# Altium PCB 400236.PcbDoc (part 2 of 7)
Units mm, origin at the board's own origin, x right, y up, seen from the top; angles counter-clockwise.
Board outline 136.53 x 63.5 mm, 4 copper layers (Top Layer, Mid-Layer 1, Mid-Layer 2, Bottom Layer), stack 1.49 mm thick; 344 components, 236 nets, 1364 pads, 1393 vias.
Unrouted connection lines stored in the file: 6.
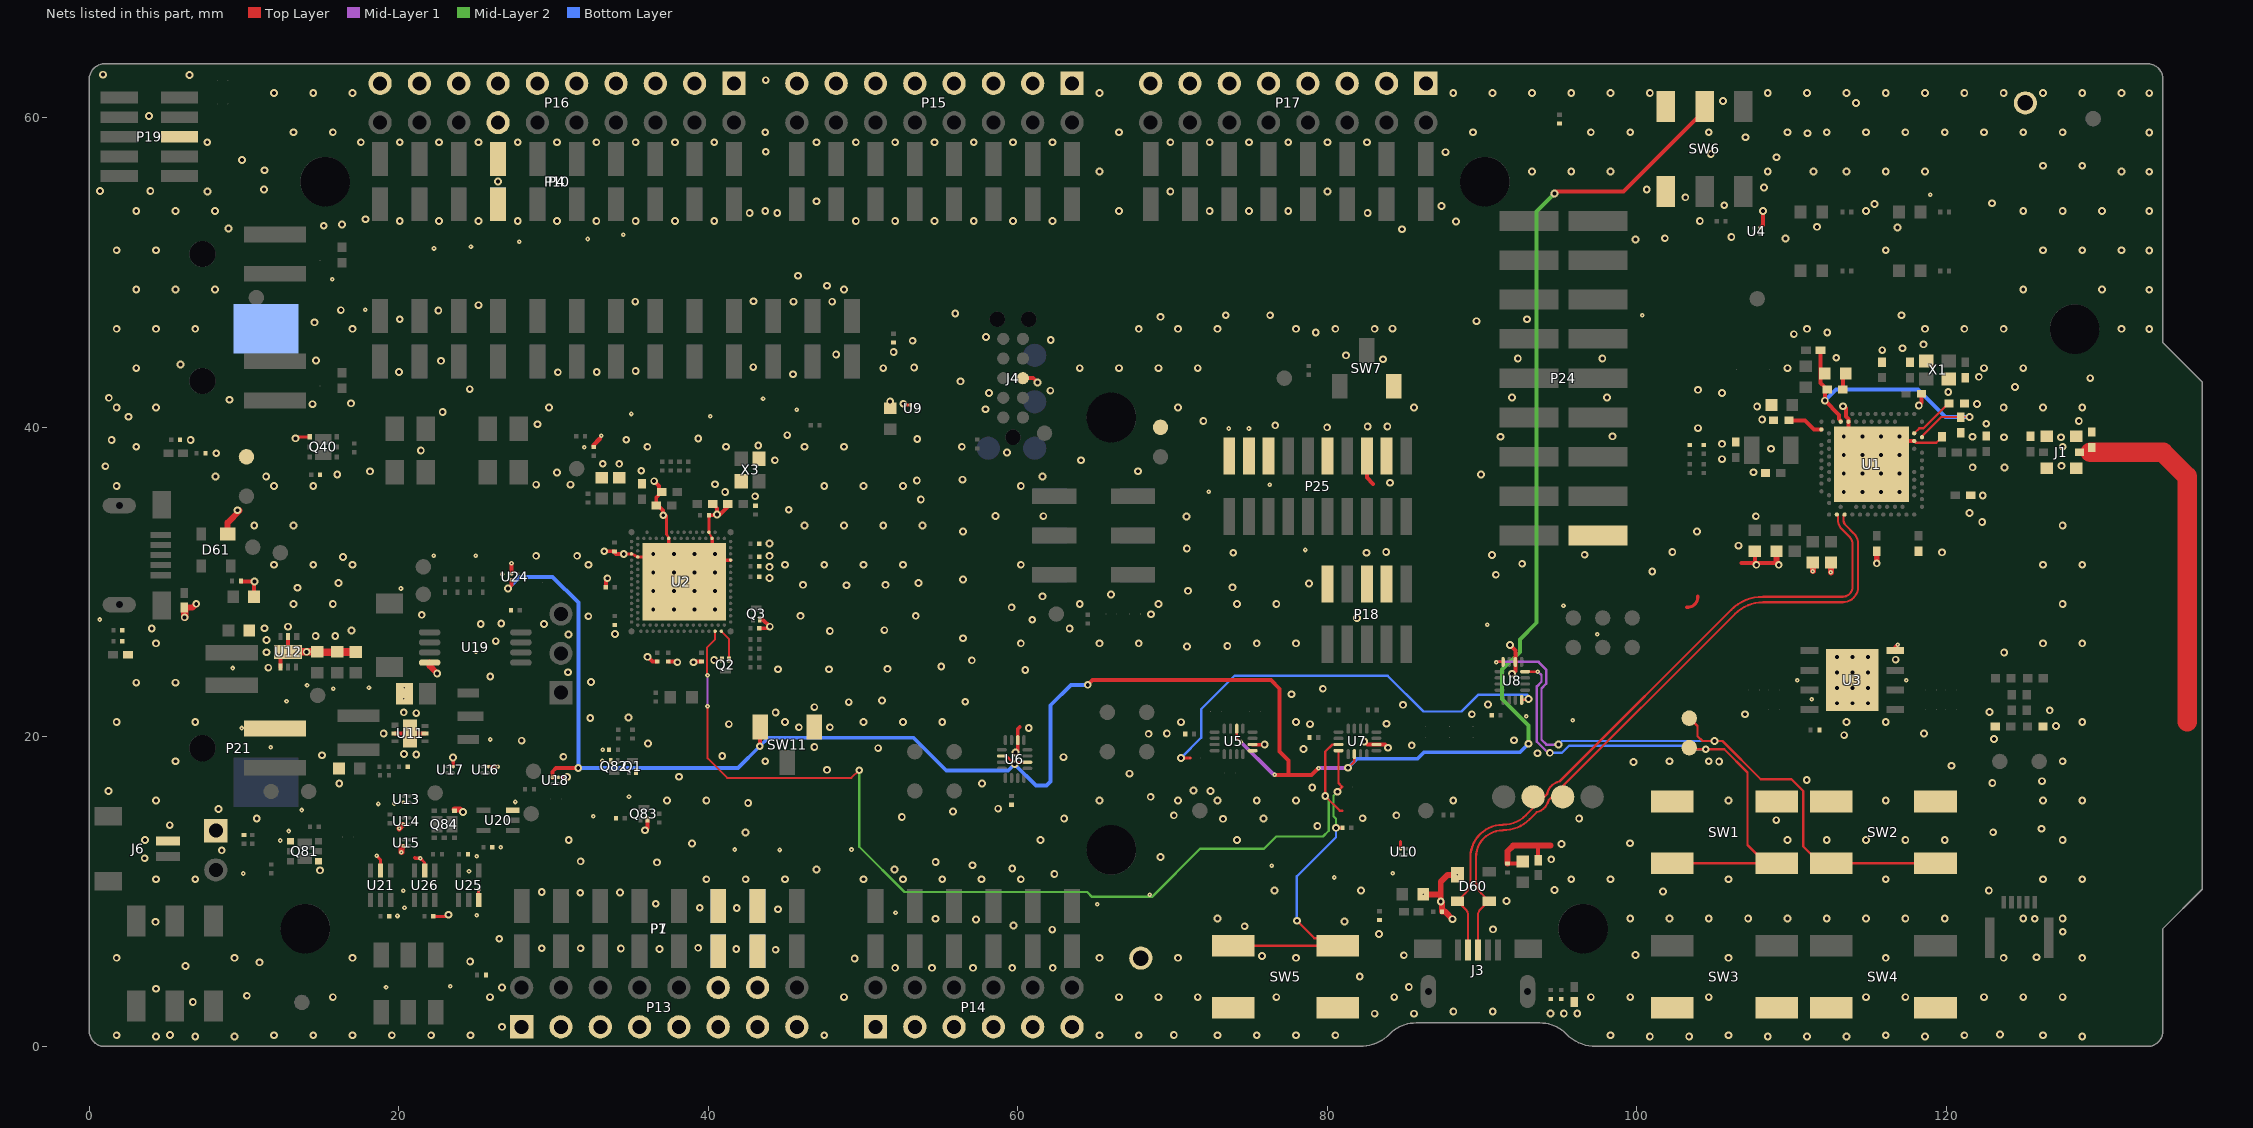
[diagram p4: the nets of this part, all layers, seen from the top]

## Part data
Bat1: library part "Bat Holder L-KLS5-CR2032-23-B1", "Bat Holder CR2032 SMD", Manufacturer="KLS Electronic", Manufacturer Part Number=L-KLS5-CR2032-23-B1, Part number IPS=N.A., Part number NEMS=100500651, Artikkelnr Noca=N.A., Author=rsk, Component Class=Connectors, Component Status=Active, ComponentLink1Description=Datasheet, ComponentLink1URL=http://www.klsele.com/admin/product_upload/20151124103736KLS5-CR2032-23-B.pdf, ComponentLink2Description="Supplier link", ComponentLink2URL=N.A., Footprint Doc=CR2032_HOLDER, HelpURL=http://www.klsele.com/products/connectors/Coin-Cell-Holders-Series/4685.html, LatestRevisionDate=2019-08-29, Note="Bat Holder CR2032", Pad Count=2, Part Number="Bat Holder L-KLS5-CR2032-23-B1", Part number Norautron=N.A., PartId=100500651, Published=2019-08-28, Supplier 1=Cabcon, Supplier 2=Mouser, Supplier Part Number 1=L-KLS5-CR2032-23-B1, Supplier Part Number 2=614-SMTU2032-LF, System=Connector
C1 C2 C17 C18: library part C0402-12p, "Capacitor, NP0, ±2%", Manufacturer=N.A., Part number IPS=00000002398, Part number NEMS=100200137, Artikkelnr Noca=20029159, Author=rsk, Component Class=Capacitors, Component Status=Active, ComponentLink1Description=Datasheet, ComponentLink1URL=N.A., ComponentLink2Description="Supplier link", ComponentLink2URL=N.A., Footprint Doc=0402, HelpURL=N.A., LatestRevisionDate=2011-05-11, Manufacturer Part Number=N.A., Note=50V, Pad Count=2, Part Number=C0402-12p, Part number Norautron=N.A., PartId=100200137, Published=2009-05-08, Supplier 1=N.A., Supplier 2=N.A., Supplier Part Number 1=N.A., Supplier Part Number 2=N.A.
C3: library part C0402-0.8p, "Capacitor, NP0, ±5%", Manufacturer=N.A., Part number IPS=00000007782, Part number NEMS=100200116, Artikkelnr Noca=N.A., Author=rsk, Component Class=Capacitors, Component Status=Active, ComponentLink1Description=Datasheet, ComponentLink1URL=https://www.murata.com/~/media/webrenewal/support/library/catalog/products/capacitor/mlcc/c02e.ashx?la=en-us, ComponentLink2Description="Supplier link", ComponentLink2URL=N.A., Footprint Doc=0402, HelpURL=N.A., LatestRevisionDate=2012-11-21, Manufacturer Part Number=N.A., Note=50V, Pad Count=2, Part Number=C0402-0.8p, Part number Norautron=N.A., PartId=100200116, Published=2009-05-08, Supplier 1=N.A., Supplier 2=N.A., Supplier Part Number 1=N.A., Supplier Part Number 2=N.A.
C4: library part C0402-0.5p, "Capacitor, C0G, ±0.05pF, 50V", Manufacturer=N.A., Part number IPS=00000004293, Part number NEMS=100200112, Artikkelnr Noca=N.A., Author=rsk, Component Class=Capacitors, Component Status=Active, ComponentLink1Description=Datasheet, ComponentLink1URL=N.A., ComponentLink2Description="Supplier link", ComponentLink2URL=N.A., Footprint Doc=0402, HelpURL=N.A., LatestRevisionDate=2020-10-13, Manufacturer Part Number=N.A., Note=50V, Pad Count=2, Part Number=C0402-0.5p, Part number Norautron=N.A., PartId=100200112, Published=2009-05-08, Supplier 1=N.A., Supplier 2=N.A., Supplier Part Number 1=N.A., Supplier Part Number 2=N.A.
C5 C7 C8 C12: library part C0402-100n, "Capacitor, X7R, ±10%", Manufacturer=N.A., Part number IPS=00000005296, Part number NEMS=100200184, Artikkelnr Noca=20039200, Author=rsk, Component Class=Capacitors, Component Status=Active, ComponentLink1Description=Datasheet, ComponentLink1URL=N.A., ComponentLink2Description="Supplier link", ComponentLink2URL=N.A., Footprint Doc=0402, HelpURL=N.A., LatestRevisionDate=2009-11-23, Manufacturer Part Number=N.A., Note=16V, Pad Count=2, Part Number=C0402-100n, Part number Norautron=N.A., PartId=100200184, Published=2009-05-08, Supplier 1=N.A., Supplier 2=N.A., Supplier Part Number 1=N.A., Supplier Part Number 2=N.A.
C6 C20 C38: library part C0603-4µ7-6.3V-X7R, "Capacitor, X7R, ±10%, 6.3V", Manufacturer="Samsung Electro-Mechanics America", Manufacturer Part Number=CL10B475KQ8NQNC, Part number IPS=00000002541, Part number NEMS=100200350, Part number Norautron=N.A., Supplier Part Number 1=1276-2087-1-ND, Artikkelnr Noca=20039473, Author=rsk, Component Class=Capacitors, Component Status=Active, ComponentLink1Description=Datasheet, ComponentLink1URL=N.A., ComponentLink2Description="Supplier link", ComponentLink2URL=N.A., Footprint Doc=0603, HelpURL=http://media.digikey.com/pdf/Data%20Sheets/Samsung%20PDFs/CL10B475KQ8NQNC_Spec.pdf, LatestRevisionDate=2015-06-10, Note=6.3V, Pad Count=2, Part Number=C0603-4µ7-6.3V-X7R, PartId=100200350, Published=2015-06-10, Supplier 1=Digi-Key, Supplier 2=N.A., Supplier Part Number 2=N.A.
C9 C10 C13 C22: library part C0402-N.C., "Not mounted", Manufacturer=N.A., Part number NEMS=100200105, Artikkelnr Noca=N.A., Assembly="Not mounted", Author=rsk, Component Class=Capacitors, Component Status=Active, ComponentLink1Description=Datasheet, ComponentLink1URL=N.A., ComponentLink2Description="Supplier link", ComponentLink2URL=N.A., Footprint Doc=0402, HelpURL=N.A., LatestRevisionDate=2009-05-08, Manufacturer Part Number=N.A., Note="Chip Cap", Pad Count=2, Part Number=C0402-N.C., Part number IPS=N.A., Part number Norautron=N.A., PartId=100200105, Published=2009-05-08, Supplier 1=N.A., Supplier 2=N.A., Supplier Part Number 1=N.A., Supplier Part Number 2=N.A.
C11: library part C0402-100p, "Capacitor, NP0, ±5%", Manufacturer=N.A., Part number IPS=00000002361, Part number NEMS=100200148, Artikkelnr Noca=20029135, Author=rsk, Component Class=Capacitors, Component Status=Active, ComponentLink1Description=Datasheet, ComponentLink1URL=N.A., ComponentLink2Description="Supplier link", ComponentLink2URL=N.A., Footprint Doc=0402, HelpURL=N.A., LatestRevisionDate=2009-05-08, Manufacturer Part Number=N.A., Note=50V, Pad Count=2, Part Number=C0402-100p, Part number Norautron=N.A., PartId=100200148, Published=2009-05-08, Supplier 1=N.A., Supplier 2=N.A., Supplier Part Number 1=N.A., Supplier Part Number 2=N.A.
C14 C15 C91 C92: library part C0603-1µ0, "Capacitor, X7R, ±10%", Manufacturer=N.A., Part number IPS=00000000616, Part number NEMS=100200271, Part number Norautron=262083409, Artikkelnr Noca=20039282, Author=rsk, Component Class=Capacitors, Component Status=Active, ComponentLink1Description=Datasheet, ComponentLink1URL=N.A., ComponentLink2Description="Supplier link", ComponentLink2URL=N.A., Footprint Doc=0603, HelpURL=N.A., LatestRevisionDate=2013-06-05, Manufacturer Part Number=N.A., Note=16V, Pad Count=2, Part Number=C0603-1µ0, PartId=100200271, Published=2009-05-08, Supplier 1=N.A., Supplier 2=N.A., Supplier Part Number 1=N.A., Supplier Part Number 2=N.A.
C16: library part C0402-47n, "Capacitor, X7R, ±10%, 25V", Manufacturer=N.A., Part number IPS=00000003143, Part number NEMS=100200180, Artikkelnr Noca=20039389, Author=rsk, Component Class=Capacitors, Component Status=Active, ComponentLink1Description=Datasheet, ComponentLink1URL=N.A., ComponentLink2Description="Supplier link", ComponentLink2URL=N.A., Footprint Doc=0402, HelpURL=N.A., LatestRevisionDate=2020-10-13, Manufacturer Part Number=N.A., Note="Chip Cap 10%", Pad Count=2, Part Number=C0402-47n, Part number Norautron=N.A., PartId=100200180, Published=2009-05-08, Supplier 1=N.A., Supplier 2=N.A., Supplier Part Number 1=N.A., Supplier Part Number 2=N.A.
C19 C21 C37: library part C0603-4µ7-10V-X7S, "Capacitor, X7S, ±10%, 10V", Manufacturer=N.A., Part number IPS=00000001779, Part number NEMS=100200351, Supplier Part Number 1=445-14258-1-ND, Artikkelnr Noca=20030013, Author=rsk, Component Class=Capacitors, Component Status=Active, ComponentLink1Description=Datasheet, ComponentLink1URL=N.A., ComponentLink2Description="Supplier link", ComponentLink2URL=N.A., Footprint Doc=0603, HelpURL=N.A., LatestRevisionDate=2016-08-15, Manufacturer Part Number=N.A., Note=10V, Pad Count=2, Part Number=C0603-4µ7-10V-X7S, Part number Norautron=N.A., PartId=100200351, Published=2016-08-15, Supplier 1=Digi-Key, Supplier 2=N.A., Supplier Part Number 2=N.A.
C23: library part C0402-1.2p, "Capacitor, NP0, ±0.1pF", Manufacturer=N.A., Part number IPS=00000005410, Part number NEMS=100200119, Artikkelnr Noca=20029157, Author=rsk, Component Class=Capacitors, Component Status=Active, ComponentLink1Description=Datasheet, ComponentLink1URL=N.A., ComponentLink2Description="Supplier link", ComponentLink2URL=N.A., Footprint Doc=0402, HelpURL=N.A., LatestRevisionDate=2011-05-11, Manufacturer Part Number=N.A., Note=50V, Pad Count=2, Part Number=C0402-1.2p, Part number Norautron=N.A., PartId=100200119, Published=2009-05-08, Supplier 1=N.A., Supplier 2=N.A., Supplier Part Number 1=N.A., Supplier Part Number 2=N.A.
C24 C25 C26 C27 C31 C32 C33 C34 C39 C42 C45 C48 C49 C50 C62 C65 C68 C69 C85 C89 C90 C93 C94: library part C0201-100n, "Capacitor, X5R, ±10%", Manufacturer=N.A., Part number IPS="00000001248, 00000002505", Part number NEMS=100200078, Part number Norautron=262071862, Artikkelnr Noca=N.A., Author=rsk, Component Class=Capacitors, Component Status=Active, ComponentLink1Description=Datasheet, ComponentLink1URL=N.A., ComponentLink2Description="Supplier link", ComponentLink2URL=N.A., Footprint Doc=0201, HelpURL=N.A., LatestRevisionDate=2017-11-09, Manufacturer Part Number=N.A., Note=16V, Pad Count=2, Part Number=C0201-100n, PartId=100200078, Published=2014-11-13, Supplier 1=N.A., Supplier 2=N.A., Supplier Part Number 1=N.A., Supplier Part Number 2=N.A.
C28 C29 C35 C36 C40: library part C0402-1µ0-6.3V-X5R-10%, "Capacitor, X5R, ±10%, 6.3V", Manufacturer=N.A., Part number NEMS=100200498, Part number Norautron=26207137, Artikkelnr Noca=N.A., Author=rubr, Component Class=Capacitors, Component Status=Active, ComponentLink1Description=Datasheet, ComponentLink1URL=N.A., ComponentLink2Description="Supplier link", ComponentLink2URL=N.A., Footprint Doc=0402, HelpURL=N.A., LatestRevisionDate=2022-01-27, Manufacturer Part Number=N.A., Note=6.3V, Pad Count=2, Part Number=C0402-1µ0-6.3V-X5R-10%, Part number IPS=N.A., PartId=100200498, Published=2022-01-27, Supplier 1=N.A., Supplier 2=N.A., Supplier Part Number 1=N.A., Supplier Part Number 2=N.A.
C30: library part C0201-2n2, "Capacitor, X7R, ±10%, 10V", Manufacturer=N.A., Part number IPS=00000001778, Part number NEMS=100200060, Part number Norautron=26470002, Artikkelnr Noca=N.A., Author=rsk, Component Class=Capacitors, Component Status=Active, ComponentLink1Description=Datasheet, ComponentLink1URL=N.A., ComponentLink2Description="Supplier link", ComponentLink2URL=N.A., Footprint Doc=0201, HelpURL=N.A., LatestRevisionDate=2014-11-13, Manufacturer Part Number=N.A., Note=10V, Pad Count=2, Part Number=C0201-2n2, PartId=100200060, Published=2014-11-13, Supplier 1=N.A., Supplier 2=N.A., Supplier Part Number 1=N.A., Supplier Part Number 2=N.A.
C46 C47: library part C0402-300p, "Capacitor, C0G, ±5%, 50V", Manufacturer=N.A., Part number IPS=00000007788, Part number NEMS=100200155, Supplier Part Number 1=490-3234-1-ND, Artikkelnr Noca=20020004, Author=rsk, Component Class=Capacitors, Component Status=Active, ComponentLink1Description=Datasheet, ComponentLink1URL=N.A., ComponentLink2Description="Supplier link", ComponentLink2URL=N.A., Footprint Doc=0402, HelpURL=N.A., LatestRevisionDate=2020-10-13, Manufacturer Part Number=N.A., Note=50V, Pad Count=2, Part Number=C0402-300p, Part number Norautron=N.A., PartId=100200155, Published=2015-05-29, Supplier 1=Digi-Key, Supplier 2=N.A., Supplier Part Number 2=N.A.
C51 C52: library part C0201-N.C., "Not mounted", Manufacturer=N.A., Part number NEMS=100200001, Artikkelnr Noca=N.A., Assembly="Not mounted", Author=rsk, Component Class=Capacitors, Component Status=Active, ComponentLink1Description=Datasheet, ComponentLink1URL=N.A., ComponentLink2Description="Supplier link", ComponentLink2URL=N.A., Footprint Doc=0201, HelpURL=N.A., LatestRevisionDate=2014-11-13, Manufacturer Part Number=N.A., Note="Chip Cap", Pad Count=2, Part Number=C0201-N.C., Part number IPS=N.A., Part number Norautron=N.A., PartId=100200001, Published=2014-11-13, Supplier 1=N.A., Supplier 2=N.A., Supplier Part Number 1=N.A., Supplier Part Number 2=N.A.
C53 C60 C63: library part C0201-10n, "Capacitor, X7R, ±10%", Manufacturer=N.A., Part number IPS=00000003480, Part number NEMS=100200067, Part number Norautron=26621779, Artikkelnr Noca=N.A., Author=rsk, Component Class=Capacitors, Component Status=Active, ComponentLink1Description=Datasheet, ComponentLink1URL=N.A., ComponentLink2Description="Supplier link", ComponentLink2URL=N.A., Footprint Doc=0201, HelpURL=N.A., LatestRevisionDate=2017-11-09, Manufacturer Part Number=N.A., Note=10V, Pad Count=2, Part Number=C0201-10n, PartId=100200067, Published=2014-11-13, Supplier 1=N.A., Supplier 2=N.A., Supplier Part Number 1=N.A., Supplier Part Number 2=N.A.
C61 C64: library part C0603-10µ, "Capacitor, X5R, ±20%", Manufacturer=N.A., Part number IPS=00000007785, Part number NEMS=100200275, Artikkelnr Noca=20039234, Author=rsk, Component Class=Capacitors, Component Status=Active, ComponentLink1Description=Datasheet, ComponentLink1URL=N.A., ComponentLink2Description="Supplier link", ComponentLink2URL=N.A., Footprint Doc=0603, HelpURL=N.A., LatestRevisionDate=2011-01-17, Manufacturer Part Number=N.A., Note=6.3V, Pad Count=2, Part Number=C0603-10µ, Part number Norautron=N.A., PartId=100200275, Published=2011-01-17, Supplier 1=N.A., Supplier 2=N.A., Supplier Part Number 1=N.A., Supplier Part Number 2=N.A.
C66 C67: library part C0201-4n7, "Capacitor, X7R, ±10%, 10V", Manufacturer=N.A., Part number IPS=00000001243, Part number NEMS=100200063, Artikkelnr Noca=N.A., Assembly="Not mounted", Author=rsk, Component Class=Capacitors, Component Status=Active, ComponentLink1Description=Datasheet, ComponentLink1URL=N.A., ComponentLink2Description="Supplier link", ComponentLink2URL=N.A., Footprint Doc=0201, HelpURL=N.A., LatestRevisionDate=2020-10-13, Manufacturer Part Number=N.A., Note="Chip Cap 1%", Pad Count=2, Part Number=C0201-4n7, Part number Norautron=N.A., PartId=100200063, Published=2014-11-13, Supplier 1=N.A., Supplier 2=N.A., Supplier Part Number 1=N.A., Supplier Part Number 2=N.A.
C80 C82 C83 C88: library part C0603-10µ-25V-X5R-CL10A106MA8NRNC, "Capacitor, X5R, ±20%, 25V", Manufacturer="Samsung Electro-Mechanics America", Manufacturer Part Number=CL10A106MA8NRNC, Part number IPS=00000009948, Part number NEMS=100200354, Part number Norautron=N.A., Supplier Part Number 1=1276-1869-1-ND, Artikkelnr Noca=20039436, Author=rsk, Component Class=Capacitors, Component Status=Active, ComponentLink1Description=Datasheet, ComponentLink1URL=N.A., ComponentLink2Description="Supplier link", ComponentLink2URL=N.A., Footprint Doc=0603, HelpURL=http://www.samsungsem.com/kr/front/downloadcms.do?path=/kr/support/product-search/mlcc/__icsFiles/afieldfile/2014/11/05&fileName=S_CL10A106MA8NRNC.pdf, LatestRevisionDate=2021-07-21, Note=25V, Pad Count=2, Part Number=C0603-10µ-25V-X5R-CL10A106MA8NRNC, PartId=100200354, Published=2015-04-10, Supplier 1=Digi-Key, Supplier 2=N.A., Supplier Part Number 2=N.A.
C86: library part C0805-4µ7, "Capacitor, X5R, ±10%, 16V", Manufacturer=N.A., Part number IPS=00000006289, Part number NEMS=100200284, Artikkelnr Noca=20039266, Author=rsk, Component Class=Capacitors, Component Status=Active, ComponentLink1Description=Datasheet, ComponentLink1URL=N.A., ComponentLink2Description="Supplier link", ComponentLink2URL=N.A., Footprint Doc=0805, HelpURL=N.A., LatestRevisionDate=2020-04-28, Manufacturer Part Number=N.A., Note=16V, Pad Count=2, Part Number=C0805-4µ7, Part number Norautron=N.A., PartId=100200284, Published=2009-08-21, Supplier 1=N.A., Supplier 2=N.A., Supplier Part Number 1=N.A., Supplier Part Number 2=N.A.
C87: library part C0201-150p-25V-COG-GRM0335C1E151JA01D, "Capacitor, NP0, ±5%, 25V", Manufacturer=N.A., Part number IPS=00000004306, Part number NEMS=100200444, Artikkelnr Noca=N.A., Author=getr, Component Class=Capacitors, Component Status=Active, ComponentLink1Description=Datasheet, ComponentLink1URL=https://www.mouser.com/datasheet/2/281/murata_03052018_GRM_Series_1-1310166.pdf, ComponentLink2Description="Supplier link", ComponentLink2URL=https://www.mouser.com/ProductDetail/Murata-Electronics/GRM0335C1E151JA01D?qs=%2Fha2pyFaduiNjPL6xbzKSo%252BchgTMqklsGrBRdYVX326W%252BRpjq1WqAQZ5mC%252Bu6szW, Footprint Doc=0201, HelpURL=N.A., LatestRevisionDate=2020-10-13, Manufacturer Part Number=N.A., Note="Chip Cap 5%", Pad Count=2, Part Number=C0201-150p-25V-COG-GRM0335C1E151JA01D, Part number Norautron=N.A., PartId=100200444, Published=2020-03-17, Supplier 1=N.A., Supplier 2=N.A., Supplier Part Number 1=N.A., Supplier Part Number 2=N.A.
C96: library part C0603-N.C., "Not mounted", Manufacturer=N.A., Part number NEMS=100200195, Artikkelnr Noca=N.A., Assembly="Not mounted", Author=rsk, Component Class=Capacitors, Component Status=Active, ComponentLink1Description=Datasheet, ComponentLink1URL=N.A., ComponentLink2Description="Supplier link", ComponentLink2URL=N.A., Footprint Doc=0603, HelpURL=N.A., LatestRevisionDate=2009-05-08, Manufacturer Part Number=N.A., Note="Chip Cap", Pad Count=2, Part Number=C0603-N.C., Part number IPS=N.A., Part number Norautron=N.A., PartId=100200195, Published=2009-05-08, Supplier 1=N.A., Supplier 2=N.A., Supplier Part Number 1=N.A., Supplier Part Number 2=N.A.
D60 D61: "Ultra low capacitance double rail-to-rail ESD protection diode", Manufacturer="NXP Semiconductors", Part number IPS=00000009951, Part number NEMS=101300082, Part number Norautron=26313940, Supplier Part Number 1=568-4140-1-ND, Artikkelnr Noca=10069015, Author=rsk, Component Class=Semiconductors, Component Status=Active, ComponentLink1Description=Datasheet, ComponentLink1URL=N.A., ComponentLink2Description="Supplier link", ComponentLink2URL=N.A., Footprint Doc=SOT-143B, HelpURL=http://www.farnell.com/datasheets/109718.pdf, LatestRevisionDate=2017-11-09, Manufacturer Part Number=PRTR5V0U2X, Note=N.A., Pad Count=4, Part Number=PRTR5V0U2X, PartId=101300082, Published=2012-06-11, Supplier 1=Digi-Key, Supplier 2=Farnell, Supplier Part Number 2=152-4157
D80 D81 D82 D83: "20V schottky barrier diode, Vf 350 mV @ 100 mA, Ir 2.0 µA @ 10 V, If 500 mA", Manufacturer="ON Semiconductor", Part number IPS=00000009952, Part number NEMS=101300131, Part number Norautron=26311081, Supplier Part Number 1=NSR0620P2T5GOSCT-ND, Artikkelnr Noca=10029169, Author=rsk, Component Class=Semiconductors, Component Status=Active, ComponentLink1Description=Datasheet, ComponentLink1URL=N.A., ComponentLink2Description="Supplier link", ComponentLink2URL=N.A., Footprint Doc=SOD-923, HelpURL=http://www.onsemi.com/pub_link/Collateral/NSR0620P2-D.PDF, LatestRevisionDate=2016-07-07, Manufacturer Part Number=NSR0620P2T5G, Note=N.A., Pad Count=2, Part Number=NSR0620P2T5G, PartId=101300131, Published=2016-07-07, Supplier 1=Digi-Key, Supplier 2=N.A., Supplier Part Number 2=N.A.
D84: "Diode Schottky Vf=0.45, Vr=40V, If=1A, Ir=1µA", Manufacturer="Good-Ark Semiconductor", Part number IPS=N.A., Part number NEMS=101300212, Supplier Part Number 1=4786-LS14CT-ND, Artikkelnr Noca=N.A., Author=rubr, Component Class=Semiconductors, Component Status=Active, ComponentLink1Description=Datasheet, ComponentLink1URL=https://goodarksemi.com/docs/datasheets/schottky_rectifiers/LS12-LS1CH.pdf, ComponentLink2Description="Supplier link", ComponentLink2URL=https://www.digikey.com/en/products/detail/good-ark-semiconductor/LS14/18667718, Footprint Doc=DO-214AC, HelpURL=N.A., LatestRevisionDate=2024-04-26, Manufacturer Part Number=LS14, Note=N.A., Pad Count=2, Part Number=LS14, Part number Norautron=N.A., PartId=101300212, Published=2024-04-26, Supplier 1=Digi-Key, Supplier 2=N.A., Supplier Part Number 2=N.A.
FB60 FB61 FB62 FB63 FB64 FB65: library part FB0402-120R@100M-500mA, "Ferrite Bead, 120 Ohm @ 100MHz, 500mA, 250 mOhm Max", Manufacturer=Murata, Manufacturer Part Number=BLM15AG121SN1D, Part number IPS=00000009954, Part number NEMS=100300099, Part number Norautron=265230631, Supplier Part Number 1=490-1005-1-ND, Artikkelnr Noca=33029317, Author=rsk, Component Class=Inductors, Component Status=Active, ComponentLink1Description=Datasheet, ComponentLink1URL=N.A., ComponentLink2Description="Supplier link", ComponentLink2URL=N.A., Footprint Doc=0402, HelpURL=http://search.murata.co.jp/Ceramy/image/img/PDF/ENG/L0110S0100BLM15A_SN.pdf, LatestRevisionDate=2014-01-10, Note="Chip EMIFIL Inductor Type Chip Ferrite Bead", Pad Count=2, Part Number=FB0402-120R@100M-500mA, PartId=100300099, Published=2011-11-14, Supplier 1=Digi-Key, Supplier 2=Farnell, Supplier Part Number 2=151-5760
  FB64 FB65: Assembly="Not mounted"
Fid1 Fid2: library part Fid-Mark, "Fiducial Mark", Manufacturer=N.A., Part number NEMS=100500073, Artikkelnr Noca=N.A., Author=rsk, Component Class=Connectors, Component Status=Active, ComponentLink1Description=Datasheet, ComponentLink1URL=N.A., ComponentLink2Description="Supplier link", ComponentLink2URL=N.A., Footprint Doc=Fiducial, HelpURL=N.A., LatestRevisionDate=2009-12-12, Manufacturer Part Number=N.A., Note=N.A., Pad Count=1, Part Number=Fid-Mark, Part number IPS=N.A., Part number Norautron=N.A., PartId=100500073, Published=2009-12-12, Supplier 1=N.A., Supplier 2=N.A., Supplier Part Number 1=N.A., Supplier Part Number 2=N.A., System=Connector
J1: "Coaxial Connector with Switch", Manufacturer=Murata, Part number IPS=00000009955, Part number NEMS=100500400, Part number Norautron=26030338, Supplier Part Number 1=490-4981-1-ND, Artikkelnr Noca=55029011, Author=rsk, Component Class=Connectors, Component Status=Active, ComponentLink1Description=Datasheet, ComponentLink1URL=N.A., ComponentLink2Description="Supplier link", ComponentLink2URL=N.A., Footprint Doc=COAXIAL-SWF, HelpURL=http://www.murata.com/products/catalog/pdf/o33e.pdf, LatestRevisionDate=2014-04-24, Manufacturer Part Number=MM8130-2600, Note=N.A., Pad Count=3, Part Number=MM8130-2600, PartId=100500400, Published=2014-04-24, Supplier 1=Digi-Key, Supplier 2=Mouser, Supplier Part Number 2=81-MM8130-2600RA2, System=Connector
J2 J3: library part USB-Micro-B-RA-SMD-PiP, "MicroUSB-B-SMT", Manufacturer="Allen Creations Corp.", Manufacturer Part Number=AJU55-BS2111-L, Part number IPS=00000007790, Part number NEMS=100500490, Part number Norautron=N.A., Artikkelnr Noca=N.A., Author=rsk, Component Class=Connectors, Component Status=Active, ComponentLink1Description=Datasheet, ComponentLink1URL=N.A., ComponentLink2Description="Supplier link", ComponentLink2URL=N.A., Footprint Doc=USB-Micro-B-RA-SMD-PiP, HelpURL="\\hizz\pro\app9717\Datasheet\connectors\Allen Creations Corp\AJU-211.pdf", LatestRevisionDate=2022-12-22, Note=N.A., Pad Count=9, Part Number=USB-Micro-B-RA-SMD-PiP, PartId=100500490, Published=2014-10-07, Supplier 1=Cabcon, Supplier 2=N.A., Supplier Part Number 1=AJU55-BS2111-L, Supplier Part Number 2=N.A., System=Connector
J4: library part TC2050-IDC-NLFP, "CBL PLUG-OF-NAILS 10-PIN", Manufacturer="Tag-Connect LLC", Part number IPS=N.A., Part number NEMS=100500463, Supplier Part Number 1=TC2050-IDC-NL-ND, Artikkelnr Noca=N.A., Author=rsk, Component Class=Connectors, Component Status=Active, ComponentLink1Description=Datasheet, ComponentLink1URL=N.A., ComponentLink2Description="Supplier link", ComponentLink2URL=N.A., Footprint Doc=TC2050-IDC-NLFP, HelpURL=http://www.tag-connect.com/Materials/TC2050-IDC%20Datasheet.pdf, LatestRevisionDate=2012-11-21, Manufacturer Part Number=TC2050-IDC-NLFP, Note=N.A., Pad Count=10, Part Number=TC2050-IDC-NLFP, Part number Norautron=N.A., PartId=100500463, Published=2012-11-21, Supplier 1=Digi-Key, Supplier 2=N.A., Supplier Part Number 2=N.A., System=Connector
J5: library part FPC_05P-0.5mm-RA-SMD, "0.5mm FPC, 5P,Right Angle SMT,Double Contact,H=1.2mm,White, Tin plated", Manufacturer=WCON, Manufacturer Part Number=5141-05RZDNWR03, Part number IPS=N.A., Part number NEMS=100500528, Artikkelnr Noca=N.A., Author=rsk, Component Class=Connectors, Component Status=Active, ComponentLink1Description=Datasheet, ComponentLink1URL=N.A., ComponentLink2Description="Supplier link", ComponentLink2URL=N.A., Footprint Doc=FPC_05P-0.5mm-RA-SMD, HelpURL=\\hizz\pro\app9717\Datasheet\connectors\W-CON\5141-05RZDNXX02.pdf, LatestRevisionDate=2024-02-02, Note="(Replaced 5141-05RZDNWR02)", Pad Count=7, Part Number=FPC_05P-0.5mm-RA-SMD, Part number Norautron=N.A., PartId=100500528, Published=2015-06-22, Supplier 1=Cabcon, Supplier 2=N.A., Supplier Part Number 1=5141-05RZDNWR03, Supplier Part Number 2=N.A., System=Connector
J6: library part SM02B-SRSS-TB, "1.0mm pitch connector side entry SMD", Manufacturer="JST Sales America Inc.", Manufacturer Part Number=SM02B-SRSS-TB(LF)(SN), Part number IPS=00000007791, Part number NEMS=100500383, Part number Norautron=N.A., Artikkelnr Noca=55010030, Author=rsk, Component Class=Connectors, Component Status=Active, ComponentLink1Description=Datasheet, ComponentLink1URL=N.A., ComponentLink2Description="Supplier link", ComponentLink2URL=N.A., Footprint Doc=SM02B-SRSS-TB, HelpURL=http://www.jst-mfg.com/product/pdf/eng/eSH.pdf, LatestRevisionDate=2016-06-20, Note="JST, Header", Pad Count=2, Part Number=SM02B-SRSS-TB, PartId=100500383, Published=2016-06-20, Supplier 1=Cabcon, Supplier 2=Digi-Key, Supplier Part Number 1=SM02B-SRSS-TB(LF)(SN), Supplier Part Number 2=455-1802-1-ND, System=Connector
L1: library part L0402-4n7-LQG15HS4N7B02D, "Inductor, 700mA, ±0.1nH, 160mR LQG", Manufacturer=Murata, Manufacturer Part Number=LQG15HS4N7B02D, Part number IPS=N.A., Part number NEMS=100300410, Supplier Part Number 1=490-LQG15HS4N7B02DTR-ND, Artikkelnr Noca=N.A., Author=stl1, Component Class=Inductors, Component Status=Active, ComponentLink1Description=Datasheet, ComponentLink1URL=N.A., ComponentLink2Description="Supplier link", ComponentLink2URL=N.A., Footprint Doc=0402, HelpURL=https://search.murata.co.jp/Ceramy/image/img/P02/JELF243B-0010.pdf, LatestRevisionDate=2022-02-09, Note="High frequency chip inductor ±5%", Pad Count=2, Part Number=L0402-4n7-LQG15HS4N7B02D, Part number Norautron=N.A., PartId=100300410, Published=2022-02-09, Supplier 1=Digi-Key, Supplier 2=Mouser, Supplier Part Number 2=81-LQG15HS4N7B02D
L2 L4: library part L0603-10µ-TDK, "Inductor, 250mA, ±20%, 1.05ohm. -55°C ~ 125°C", Manufacturer="TDK Corporation", Manufacturer Part Number=MLZ1608M100WTD25, Part number IPS=N.A., Part number NEMS=100300079, Part number Norautron=26521771, Supplier Part Number 1=445-175588-1-ND, Artikkelnr Noca=N.A., Author=rsk, Component Class=Inductors, Component Status=Active, ComponentLink1Description=Datasheet, ComponentLink1URL=N.A., ComponentLink2Description="Supplier link", ComponentLink2URL=N.A., Footprint Doc=0603, HelpURL=https://product.tdk.com/info/en/catalog/datasheets/inductor_automotive_decoupling_mlz1608_en.pdf, LatestRevisionDate=2012-09-19, Note=N.A., Pad Count=2, Part Number=L0603-10µ-TDK, PartId=100300079, Published=2019-05-06, Supplier 1=Digi-Key, Supplier 2=Mouser, Supplier Part Number 2=810-MLZ1608M100WTD25
L3: library part L0402-15n-LQG15HS15NJ02D, "Inductor, 450mA, ±5%,  0.32ohm", Manufacturer=Murata, Manufacturer Part Number=LQG15HS15NJ02D, Part number IPS=N.A., Part number NEMS=100300412, Supplier Part Number 1=490-2625-2-ND, Artikkelnr Noca=N.A., Author=stl1, Component Class=Inductors, Component Status=Active, ComponentLink1Description=Datasheet, ComponentLink1URL=N.A., ComponentLink2Description="Supplier link", ComponentLink2URL=N.A., Footprint Doc=0402, HelpURL=https://no.mouser.com/datasheet/2/281/1/JELF243B_0010-1699614.pdf, LatestRevisionDate=2022-02-10, Note="High frequency chip inductor ±5%", Pad Count=2, Part Number=L0402-15n-LQG15HS15NJ02D, Part number Norautron=N.A., PartId=100300412, Published=2022-02-10, Supplier 1=Digi-Key, Supplier 2=Mouser, Supplier Part Number 2=81-LQG15HS15NJ02D
L80: library part VLS3012HBX-4R7M-N, "4.7µH Shielded Wirewound Inductor 2.23A 201 mOhm Max Nonstandard", Manufacturer="TDK Corporation", Part number IPS=N.A., Part number NEMS=100300407, Supplier Part Number 1=445-VLS3012HBX-4R7M-NTR-ND, Artikkelnr Noca=N.A., Author=stl1, Component Class=Inductors, Component Status=Active, ComponentLink1Description=Datasheet, ComponentLink1URL=N.A., ComponentLink2Description="Supplier link", ComponentLink2URL=N.A., Footprint Doc=VLS3012HBX, HelpURL=https://product.tdk.com/en/search/inductor/inductor/smd/info?part_no=VLS3012HBX-4R7M-N, LatestRevisionDate=2022-02-09, Manufacturer Part Number=VLS3012HBX-4R7M-N, Note=N.A., Pad Count=2, Part Number=VLS3012HBX-4R7M-N, Part number Norautron=N.A., PartId=100300407, Published=2022-02-09, Supplier 1=Digi-Key, Supplier 2=Mouser, Supplier Part Number 2=810-VLS3012HBX4R7M-N
L81: library part NR3015-4µ7-1.04A-144mOhm, "Ferrite Inductor, Shielded, 1,04A, 144mOhm", Manufacturer="Taiyo Yuden", Manufacturer Part Number=NR3015T4R7M, Part number IPS=00000009960, Part number NEMS=100300145, Part number Norautron=N.A., Supplier Part Number 1=587-1649-1-ND, Artikkelnr Noca=33029551, Author=rsk, Component Class=Inductors, Component Status=Active, ComponentLink1Description=Datasheet, ComponentLink1URL=N.A., ComponentLink2Description="Supplier link", ComponentLink2URL=N.A., Footprint Doc=1212, HelpURL=http://www.yuden.co.jp/ut/product/category/inductor/NR3015T4R7M.pdf, LatestRevisionDate=2014-01-22, Note=N.A., Pad Count=2, Part Number=NR3015-4µ7-1.04A-144mOhm, PartId=100300145, Published=2014-01-22, Supplier 1=Digi-Key, Supplier 2=Mouser, Supplier Part Number 2=963-NR3015T4R7M
LED1 LED2 LED3 LED4 LED5: library part "VS 25C7M5", "LED, Green, 0603, 573nm, Vf=2.0V, 24mcd, - 40 to +85°C", Manufacturer="Victory Electronics", Part number IPS="00000001274, 00000009961", Part number NEMS=101400097, Part number Norautron=26313411, Supplier Part Number 1=N.A., Artikkelnr Noca=13019193, Author=rsk, Component Class=Optoelectronics, Component Status=Active, ComponentLink1Description=Datasheet, ComponentLink1URL=N.A., ComponentLink2Description="Supplier link", ComponentLink2URL=N.A., Footprint Doc=0603, HelpURL="\\hizz\pro\app9717\Datasheet\optoelectronics\Victory Electronics\VS 25C7M5.pdf", LatestRevisionDate=2020-10-23, Manufacturer Part Number="VS 25C7M5", Note=N.A., Pad Count=2, Part Number="VS 25C7M5", PartId=101400097, Published=2017-08-21, Supplier 1="EC Partner", Supplier 2=N.A., Supplier Part Number 2=N.A.
P1 P3 P6: library part "Socket 1x8 SMD", "Socket 1x8, 2.54mm (100mil), SMD", Manufacturer=WCON, Manufacturer Part Number=2171-108MS0CUNR3, Part number IPS=N.A., Part number NEMS=100500412, Artikkelnr Noca=N.A., Author=rsk, Component Class=Connectors, Component Status=Active, ComponentLink1Description=Datasheet, ComponentLink1URL=N.A., ComponentLink2Description="Supplier link", ComponentLink2URL=N.A., Footprint Doc=SOCKET_1x8_SMD, HelpURL=N.A., LatestRevisionDate=2024-02-02, Note="(Replaced 2171-108MS0CUNR1)", Pad Count=8, Part Number="Socket 1x8 SMD", Part number Norautron=N.A., PartId=100500412, Published=2016-01-22, Supplier 1=Cabcon, Supplier 2=N.A., Supplier Part Number 1=2171-108MS0CUNR3, Supplier Part Number 2=N.A., System=Connector
P2: library part "Socket 1x6 SMD", "Socket 1x6, 2.54mm (100mil), SMD", Manufacturer=WCON, Manufacturer Part Number=2171-106MS0CUNR3, Part number IPS=N.A., Part number NEMS=100500408, Artikkelnr Noca=N.A., Author=rsk, Component Class=Connectors, Component Status=Active, ComponentLink1Description=Datasheet, ComponentLink1URL=N.A., ComponentLink2Description="Supplier link", ComponentLink2URL=N.A., Footprint Doc=SOCKET_1x6_SMD, HelpURL=N.A., LatestRevisionDate=2024-02-02, Note="(Replaced 2171-106MS0CUNR1)", Pad Count=6, Part Number="Socket 1x6 SMD", Part number Norautron=N.A., PartId=100500408, Published=2016-01-22, Supplier 1=Cabcon, Supplier 2=N.A., Supplier Part Number 1=2171-106MS0CUNR3, Supplier Part Number 2=N.A., System=Connector
P4: library part "Socket 1x10 SMD", "Socket 1x10, 2.54mm (100mil), SMD", Manufacturer=WCON, Manufacturer Part Number=2171-110MS0CUNR3, Part number IPS=N.A., Part number NEMS=100500416, Artikkelnr Noca=N.A., Author=rsk, Component Class=Connectors, Component Status=Active, ComponentLink1Description=Datasheet, ComponentLink1URL=N.A., ComponentLink2Description="Supplier link", ComponentLink2URL=N.A., Footprint Doc=SOCKET_1x10_SMD, HelpURL=N.A., LatestRevisionDate=2024-02-02, Note="(Replaced 2171-110MS0CUNR1)", Pad Count=10, Part Number="Socket 1x10 SMD", Part number Norautron=N.A., PartId=100500416, Published=2016-01-22, Supplier 1=Cabcon, Supplier 2=N.A., Supplier Part Number 1=2171-110MS0CUNR3, Supplier Part Number 2=N.A., System=Connector
P5: library part "Pin Header 2x3 SMD", "Pin Header 2x3, 2.54mm (100mil) SMD", Manufacturer=WCON, Manufacturer Part Number=1125-1203S0M116CR03, Part number IPS=N.A., Part number NEMS=100500242, Artikkelnr Noca=N.A., Author=rsk, Component Class=Connectors, Component Status=Active, ComponentLink1Description=Datasheet, ComponentLink1URL=N.A., ComponentLink2Description="Supplier link", ComponentLink2URL=N.A., Footprint Doc=HDR_2x3-SMD, HelpURL=\\hizz\pro\app9717\Datasheet\connectors\W-CON\1125-12XXXXMXXXXX.PDF, LatestRevisionDate=2024-02-02, Note="(Replaced 1125-1203S0M116CR03)", Pad Count=6, Part Number="Pin Header 2x3 SMD", Part number Norautron=N.A., PartId=100500242, Published=2016-01-22, Supplier 1=Cabcon, Supplier 2=N.A., Supplier Part Number 1=1125-1203S0M116CR03, Supplier Part Number 2=N.A., System=Connector
P7 P9 P12: library part "Pin List 1x8 SMD, N.C.", "Pin List 1x8, 2.54mm (100mil), SMD", Manufacturer=WCON, Manufacturer Part Number=1125-1108S0M116CR04, Part number IPS=N.A., Part number NEMS=100500330, Artikkelnr Noca=N.A., Assembly="Not mounted", Author=rsk, Component Class=Connectors, Component Status=Active, ComponentLink1Description=Datasheet, ComponentLink1URL=N.A., ComponentLink2Description="Supplier link", ComponentLink2URL=N.A., Footprint Doc=LIST_1x8_SMD, HelpURL=\\hizz\pro\app9717\Datasheet\connectors\W-CON\1125-11XXXXMXXXXX.pdf, LatestRevisionDate=2024-02-02, Note="(Replaced 1125-1108S0M116R2)", Pad Count=8, Part Number="Pin List 1x8 SMD, N.C.", Part number Norautron=N.A., PartId=100500330, Published=2016-01-22, Supplier 1=Cabcon, Supplier 2=N.A., Supplier Part Number 1=1125-1108S0M116CR04, Supplier Part Number 2=N.A., System=Connector
P8: library part "Pin List 1x6 SMD, N.C.", "Pin List 1x6, 2.54mm (100mil), SMD", Manufacturer=WCON, Manufacturer Part Number=1125-1106S0M116R2, Part number IPS=N.A., Part number NEMS=100500321, Artikkelnr Noca=55010026, Assembly="Not mounted", Author=rsk, Component Class=Connectors, Component Status=Active, ComponentLink1Description=Datasheet, ComponentLink1URL=N.A., ComponentLink2Description="Supplier link", ComponentLink2URL=N.A., Footprint Doc=LIST_1x6_SMD, HelpURL=\\hizz\pro\app9717\Datasheet\connectors\W-CON\1125-11XXXXMXXXXX.pdf, LatestRevisionDate=2016-03-29, Note=N.A., Pad Count=6, Part Number="Pin List 1x6 SMD, N.C.", Part number Norautron=N.A., PartId=100500321, Published=2016-03-29, Supplier 1=Cabcon, Supplier 2=Samtec, Supplier Part Number 1=1125-1106S0M116R2, Supplier Part Number 2=TSM-106-01-L-SV-P-TR, System=Connector
P10: library part "Pin List 1x10 SMD, N.C.", "Pin List 1x10, 2.54mm (100mil), SMD", Manufacturer=WCON, Manufacturer Part Number=1125-1110S0M116R2, Part number IPS=N.A., Part number NEMS=100500338, Artikkelnr Noca=55010028, Assembly="Not mounted", Author=rsk, Component Class=Connectors, Component Status=Active, ComponentLink1Description=Datasheet, ComponentLink1URL=N.A., ComponentLink2Description="Supplier link", ComponentLink2URL=N.A., Footprint Doc=LIST_1x10_SMD, HelpURL=\\hizz\pro\app9717\Datasheet\connectors\W-CON\1125-11XXXXMXXXXX.pdf, LatestRevisionDate=2016-03-29, Note=N.A., Pad Count=10, Part Number="Pin List 1x10 SMD, N.C.", Part number Norautron=N.A., PartId=100500338, Published=2016-03-29, Supplier 1=Cabcon, Supplier 2=Samtec, Supplier Part Number 1=1125-1110S0M116R2, Supplier Part Number 2=TSM-110-01-L-SV-P-TR, System=Connector
P11: library part "Socket 2x3 SMD, N.C.", "Socket 2x3, 2.54mm (100mil), SMD", Manufacturer=WCON, Manufacturer Part Number=2171-203MS0CUNR3, Part number IPS=N.A., Part number NEMS=100500434, Artikkelnr Noca=N.A., Assembly="Not mounted", Author=rsk, Component Class=Connectors, Component Status=Active, ComponentLink1Description=Datasheet, ComponentLink1URL=N.A., ComponentLink2Description="Supplier link", ComponentLink2URL=N.A., Footprint Doc=SOCKET_2x3_SMD-2.54mm, HelpURL=\\hizz\pro\app9717\Datasheet\connectors\W-CON\2171-2XXMXXCUNXX.pdf, LatestRevisionDate=2024-05-15, Note="(Replaced 2171-203MS0CUNR1)", Pad Count=6, Part Number="Socket 2x3 SMD, N.C.", Part number Norautron=N.A., PartId=100500434, Published=2014-06-10, Supplier 1=Cabcon, Supplier 2=N.A., Supplier Part Number 1=2171-203MS0CUNR3, Supplier Part Number 2=N.A., System=Connector
P13 P15 P17: library part "Pin Header 2x8, N.C.", "Pin Header 2x8, 2.54mm (100mil)", Manufacturer=N.A., Part number NEMS=100500270, Artikkelnr Noca=N.A., Assembly="Not mounted", Author=rsk, Component Class=Connectors, Component Status=Active, ComponentLink1Description=Datasheet, ComponentLink1URL=N.A., ComponentLink2Description="Supplier link", ComponentLink2URL=N.A., Footprint Doc=HDR_2x8, HelpURL=N.A., LatestRevisionDate=2009-12-12, Manufacturer Part Number=N.A., Note=N.A., Pad Count=16, Part Number="Pin Header 2x8, N.C.", Part number IPS=N.A., Part number Norautron=N.A., PartId=100500270, Published=2009-12-12, Supplier 1=N.A., Supplier 2=N.A., Supplier Part Number 1=N.A., Supplier Part Number 2=N.A., System=Connector
P14: library part "Pin Header 2x6, N.C.", "Pin Header 2x6, 2.54mm (100mil)", Manufacturer=N.A., Part number NEMS=100500265, Artikkelnr Noca=N.A., Assembly="Not mounted", Author=rsk, Component Class=Connectors, Component Status=Active, ComponentLink1Description=Datasheet, ComponentLink1URL=N.A., ComponentLink2Description="Supplier link", ComponentLink2URL=N.A., Footprint Doc=HDR_2x6, HelpURL=N.A., LatestRevisionDate=2014-07-04, Manufacturer Part Number=N.A., Note=N.A., Pad Count=12, Part Number="Pin Header 2x6, N.C.", Part number IPS=N.A., Part number Norautron=N.A., PartId=100500265, Published=2009-12-12, Supplier 1=N.A., Supplier 2=N.A., Supplier Part Number 1=N.A., Supplier Part Number 2=N.A., System=Connector
P16: library part "Pin Header 2x10, N.C.", "Pin Header 2x10, 2.54mm (100mil)", Manufacturer=N.A., Part number NEMS=100500274, Artikkelnr Noca=N.A., Assembly="Not mounted", Author=rsk, Component Class=Connectors, Component Status=Active, ComponentLink1Description=Datasheet, ComponentLink1URL=N.A., ComponentLink2Description="Supplier link", ComponentLink2URL=N.A., Footprint Doc=HDR_2x10, HelpURL=N.A., LatestRevisionDate=2017-02-02, Manufacturer Part Number=N.A., Note=N.A., Pad Count=20, Part Number="Pin Header 2x10, N.C.", Part number IPS=N.A., Part number Norautron=N.A., PartId=100500274, Published=2017-01-30, Supplier 1=N.A., Supplier 2=N.A., Supplier Part Number 1=N.A., Supplier Part Number 2=N.A., System=Connector
P18 P19: library part "Pin Header 2x5 SMD, 1.27mm, KS", "Pin Header 2x5, 1.27mm (50mil), SMD, Keying Shroud", Manufacturer=WCON, Manufacturer Part Number=3132-10MS0BK00R5, Part number IPS=N.A., Part number NEMS=100500261, Artikkelnr Noca=N.A., Author=rsk, Component Class=Connectors, Component Status=Active, ComponentLink1Description=Datasheet, ComponentLink1URL=N.A., ComponentLink2Description="Supplier link", ComponentLink2URL=N.A., Footprint Doc=HDR_2x5-SMD-1.27mm, HelpURL=\\hizz\pro\app9717\Datasheet\connectors\W-CON\3132-XXMXXBK00XX.pdf, LatestRevisionDate=2024-02-02, Note="(Replaced 3132-10MS0BK00R1)", Pad Count=10, Part Number="Pin Header 2x5 SMD, 1.27mm, KS", Part number Norautron=N.A., PartId=100500261, Published=2016-01-22, Supplier 1=Cabcon, Supplier 2=N.A., Supplier Part Number 1=3132-10MS0BK00R5, Supplier Part Number 2=N.A., System=Connector
P20: library part "Pin List 1x13 SMD", "Pin List 1x13, 2.54mm (100mil), SMD", Manufacturer=WCON, Manufacturer Part Number=1125-1113S0M116CR04, Part number IPS=N.A., Part number NEMS=100500345, Artikkelnr Noca=N.A., Author=rsk, Component Class=Connectors, Component Status=Active, ComponentLink1Description=Datasheet, ComponentLink1URL=N.A., ComponentLink2Description="Supplier link", ComponentLink2URL=N.A., Footprint Doc=LIST_1x13_SMD, HelpURL=N.A., LatestRevisionDate=2024-02-02, Note="(Replaced 1125-1113S0M116R2)", Pad Count=13, Part Number="Pin List 1x13 SMD", Part number Norautron=N.A., PartId=100500345, Published=2015-11-10, Supplier 1=Cabcon, Supplier 2=N.A., Supplier Part Number 1=1125-1113S0M116CR04, Supplier Part Number 2=N.A., System=Connector
P21 P22 P23: library part "Pin List Ang 1x2 SMD, 2.54mm", "Pin List 1x2, 2.54mm (100mil), Right Angled, SMD", Manufacturer=WCON, Manufacturer Part Number=1125B-1102S0Z135CR06, Part number IPS=N.A., Part number NEMS=100500354, Artikkelnr Noca=N.A., Author=rsk, Component Class=Connectors, Component Status=Active, ComponentLink1Description=Datasheet, ComponentLink1URL=N.A., ComponentLink2Description="Supplier link", ComponentLink2URL=N.A., Footprint Doc=LIST_ANG_1x2-SMD-2.54MM, HelpURL=\\hizz\pro\app9717\Datasheet\connectors\W-CON\1125B-11XXXXZXXXXX.pdf, LatestRevisionDate=2024-02-02, Note="(Replaced 1125B-1102S0Z135R2)", Pad Count=2, Part Number="Pin List Ang 1x2 SMD, 2.54mm", Part number Norautron=N.A., PartId=100500354, Published=2016-01-22, Supplier 1=Cabcon, Supplier 2=N.A., Supplier Part Number 1=1125B-1102S0Z135CR06, Supplier Part Number 2=N.A., System=Connector
P24: library part "Socket 2x9 SMD", "Socket 2x9, 2.54mm (100mil), SMD", Manufacturer=WCON, Manufacturer Part Number=2171-209MS0CUNR3, Part number IPS=N.A., Part number NEMS=100500440, Artikkelnr Noca=N.A., Author=rsk, Component Class=Connectors, Component Status=Active, ComponentLink1Description=Datasheet, ComponentLink1URL=N.A., ComponentLink2Description="Supplier link", ComponentLink2URL=N.A., Footprint Doc=SOCKET_2x9_SMD-2.54mm, HelpURL=N.A., LatestRevisionDate=2024-05-16, Note="(Replaced 2171-209MS0CUNR1)", Pad Count=18, Part Number="Socket 2x9 SMD", Part number Norautron=N.A., PartId=100500440, Published=2016-07-07, Supplier 1=Cabcon, Supplier 2=N.A., Supplier Part Number 1=2171-209MS0CUNR3, Supplier Part Number 2=N.A., System=Connector
P25: library part "Pin Header 2x10 SMD, 1.27mm, KS, N.C.", "Pin Header 2x10, 1.27mm (50mil), SMD, Keying Shroud", Manufacturer=WCON, Manufacturer Part Number=3132-20MS0BK00R1, Part number IPS=N.A., Part number NEMS=100500279, Artikkelnr Noca=N.A., Assembly="Not mounted", Author=rsk, Component Class=Connectors, Component Status=Active, ComponentLink1Description=Datasheet, ComponentLink1URL=N.A., ComponentLink2Description="Supplier link", ComponentLink2URL=N.A., Footprint Doc=HDR_2x10-SMD-1.27mm, HelpURL=N.A., LatestRevisionDate=2017-10-23, Note=N.A., Pad Count=20, Part Number="Pin Header 2x10 SMD, 1.27mm, KS, N.C.", Part number Norautron=N.A., PartId=100500279, Published=2017-09-07, Supplier 1=Cabcon, Supplier 2=Digi-Key, Supplier Part Number 1=3132-20MS0BK00R1, Supplier Part Number 2=FTSH-110-01-F-DV-K-ND, System=Connector
P26: library part "Socket 1x13 SMD, N.C.", "Socket 1x13, 2.54mm (100mil), SMD", Manufacturer=WCON, Manufacturer Part Number=2171-113MS0CUNR1, Part number IPS=N.A., Part number NEMS=100500422, Artikkelnr Noca=N.A., Assembly="Not mounted", Author=rsk, Component Class=Connectors, Component Status=Active, ComponentLink1Description=Datasheet, ComponentLink1URL=N.A., ComponentLink2Description="Supplier link", ComponentLink2URL=N.A., Footprint Doc=SOCKET_1x13_SMD, HelpURL=N.A., LatestRevisionDate=2019-05-27, Note=N.A., Pad Count=13, Part Number="Socket 1x13 SMD, N.C.", Part number Norautron=N.A., PartId=100500422, Published=2019-05-27, Supplier 1=Cabcon, Supplier 2=Samtec, Supplier Part Number 1=2171-113MS0CUNR1, Supplier Part Number 2=SSM-113-L-SV-P-TR, System=Connector
P27: library part "Pin List 1x2, N.C.", "Pin List 1x2, 2.54mm (100mil)", Manufacturer=N.A., Part number NEMS=100500298, Artikkelnr Noca=N.A., Assembly="Not mounted", Author=rsk, Component Class=Connectors, Component Status=Active, ComponentLink1Description=Datasheet, ComponentLink1URL=N.A., ComponentLink2Description="Supplier link", ComponentLink2URL=N.A., Footprint Doc=LIST_1x2, HelpURL=N.A., LatestRevisionDate=2017-02-02, Manufacturer Part Number=N.A., Note=N.A., Pad Count=2, Part Number="Pin List 1x2, N.C.", Part number IPS=N.A., Part number Norautron=N.A., PartId=100500298, Published=2017-01-30, Supplier 1=N.A., Supplier 2=N.A., Supplier Part Number 1=N.A., Supplier Part Number 2=N.A., System=Connector
P28: library part "Pin List 1x3, N.C.", "Pin List 1x3, 2.54mm (100mil)", Manufacturer=N.A., Part number NEMS=100500305, Artikkelnr Noca=N.A., Assembly="Not mounted", Author=rsk, Component Class=Connectors, Component Status=Active, ComponentLink1Description=Datasheet, ComponentLink1URL=N.A., ComponentLink2Description="Supplier link", ComponentLink2URL=N.A., Footprint Doc=LIST_1x3, HelpURL=N.A., LatestRevisionDate=2017-09-07, Manufacturer Part Number=N.A., Note=N.A., Pad Count=3, Part Number="Pin List 1x3, N.C.", Part number IPS=N.A., Part number Norautron=N.A., PartId=100500305, Published=2017-09-07, Supplier 1=N.A., Supplier 2=N.A., Supplier Part Number 1=N.A., Supplier Part Number 2=N.A., System=Connector
Q1 Q2 Q3 Q82 Q83: "N-Channel MOSFET, 20V, 1A, 470mOhm, 400mW", Manufacturer="Rohm Semiconductor", Part number IPS=00000009976, Part number NEMS=101300132, Part number Norautron=26320026, Supplier Part Number 1=RV2C010UNT2LCT-ND, Artikkelnr Noca=35010020, Author=rsk, Component Class=Semiconductors, Component Status=Active, ComponentLink1Description=Datasheet, ComponentLink1URL=N.A., ComponentLink2Description="Supplier link", ComponentLink2URL=N.A., Footprint Doc=DFN-3, HelpURL=http://rohmfs.rohm.com/en/products/databook/datasheet/discrete/transistor/mosfet/rv2c010unt2l-e.pdf, LatestRevisionDate=2016-08-09, Manufacturer Part Number=RV2C010UNT2L, Note=N.A., Pad Count=3, Part Number=RV2C010UNT2L, PartId=101300132, Published=2016-08-09, Supplier 1=Digi-Key, Supplier 2=Mouser, Supplier Part Number 2=755-RV2C010UNT2L
Q40 Q84: library part PMCPB5530X,115, "Mosfet Array N and P-Channel 20V 4A (Ta), 3.4A (Ta) 490mW Surface Mount 6-HUSON-EP (2x2)", Manufacturer=Nexperia, Part number IPS=00000001918, Part number NEMS=101300165, Part number Norautron=N.A., Supplier Part Number 1=1727-1327-1-ND, Artikkelnr Noca=N.A., Author=rsk, Component Class=Semiconductors, Component Status=Active, ComponentLink1Description=Datasheet, ComponentLink1URL=https://assets.nexperia.com/documents/data-sheet/PMCPB5530X.pdf, ComponentLink2Description="Supplier link", ComponentLink2URL=https://www.digikey.com/product-detail/en/nexperia-usa-inc/PMCPB5530X115/1727-1327-1-ND/4386339, Footprint Doc=6-UDFN, HelpURL=https://www.nexperia.com/products/mosfets/small-signal-mosfets/PMCPB5530X.html, LatestRevisionDate=2018-04-30, Manufacturer Part Number=PMCPB5530X,115, Note=N.A., Pad Count=8, Part Number=PMCPB5530X,115, PartId=101300165, Published=2018-04-30, Supplier 1=Digi-Key, Supplier 2=Mouser, Supplier Part Number 2=771-PMCPB5530X115
Q80: "45V NPN high gain power transistor", Manufacturer="Diodes Incorporated", Part number IPS=00000009974, Part number NEMS=101300130, Part number Norautron=N.A., Supplier Part Number 1=FCX690BCT-ND, Artikkelnr Noca=35010019, Author=rsk, Component Class=Semiconductors, Component Status=Active, ComponentLink1Description=Datasheet, ComponentLink1URL=N.A., ComponentLink2Description="Supplier link", ComponentLink2URL=N.A., Footprint Doc=SOT-89, HelpURL=http://www.diodes.com/_files/datasheets/FCX690B.pdf, LatestRevisionDate=2016-07-07, Manufacturer Part Number=FCX690BTA, Note=N.A., Pad Count=3, Part Number=FCX690BTA, PartId=101300130, Published=2016-07-07, Supplier 1=Digi-Key, Supplier 2=N.A., Supplier Part Number 2=N.A.
Q81: "Dual N Ch MOFET, 5.8A, 55mOhm max, 620mW", Manufacturer="Taiwan Semiconductor", Part number IPS=00000001703, Part number NEMS=101300161, Part number Norautron=N.A., Supplier Part Number 1=TSM250N02DCQRFGCT-ND, Artikkelnr Noca=N.A., Author=rsk, Component Class=Semiconductors, Component Status=Active, ComponentLink1Description=Datasheet, ComponentLink1URL=https://www.taiwansemi.com/products/datasheet/TSM250N02D_B15.pdf, ComponentLink2Description="Supplier link", ComponentLink2URL=N.A., Footprint Doc=VDFN-6, HelpURL=https://www.taiwansemi.com/products/datasheet/TSM250N02D_B15.pdf, LatestRevisionDate=2018-10-31, Manufacturer Part Number="TSM250N02DCQ RFG", Note=N.A., Pad Count=6, Part Number="TSM250N02DCQ RFG", PartId=101300161, Published=2018-10-31, Supplier 1=Digi-Key, Supplier 2=N.A., Supplier Part Number 2=N.A.
R1 R2: library part R0201-0R, "Resistor, ±5%, 0.05W", Manufacturer=N.A., Part number IPS=00000003245, Part number NEMS=100100001, Artikkelnr Noca=N.A., Author=rsk, Component Class=Resistors, Component Status=Active, ComponentLink1Description=Datasheet, ComponentLink1URL=N.A., ComponentLink2Description="Supplier link", ComponentLink2URL=N.A., Footprint Doc=0201, HelpURL=N.A., LatestRevisionDate=2017-11-09, Manufacturer Part Number=N.A., Note="Chip Res 5%", Pad Count=2, Part Number=R0201-0R, Part number Norautron=N.A., PartId=100100001, Published=2014-11-13, Supplier 1=N.A., Supplier 2=N.A., Supplier Part Number 1=N.A., Supplier Part Number 2=N.A.